# Altium PCB PCB2.PcbDoc
Units mm, origin at the board's own origin, x right, y up, seen from the top; angles counter-clockwise.
Board outline 12.83 x 12.7 mm, 2 copper layers (Top Layer, Bottom Layer); 12 components, 10 nets, 28 pads, 6 vias.
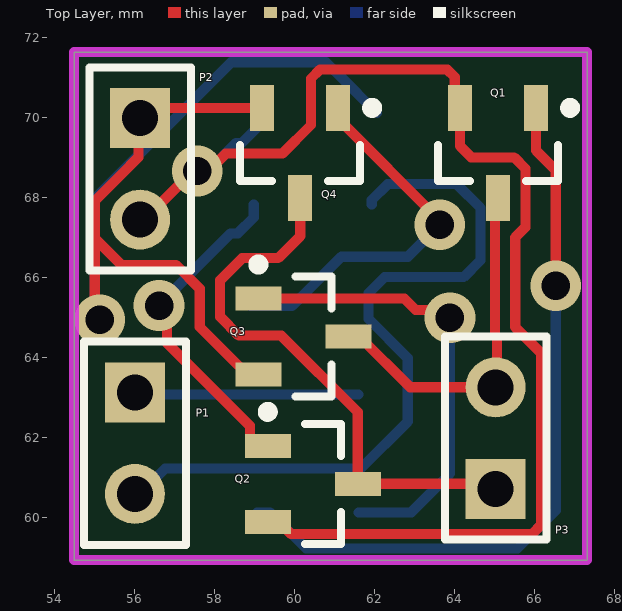
[diagram p0: Top Layer view]
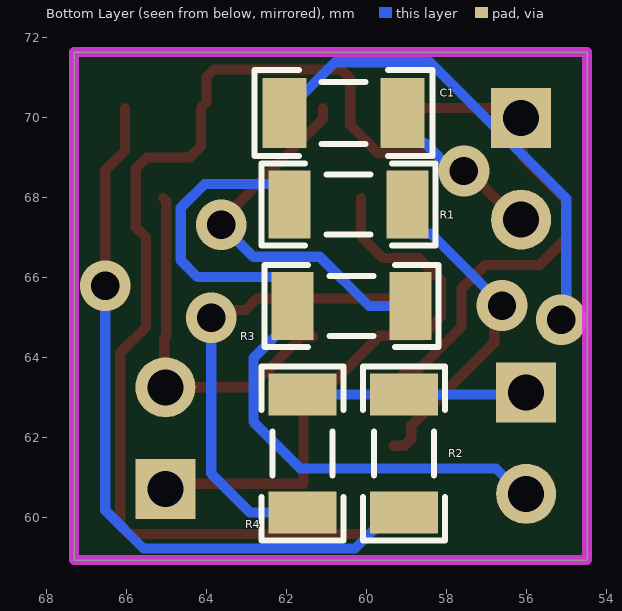
[diagram p1: Bottom Layer view, seen from below]
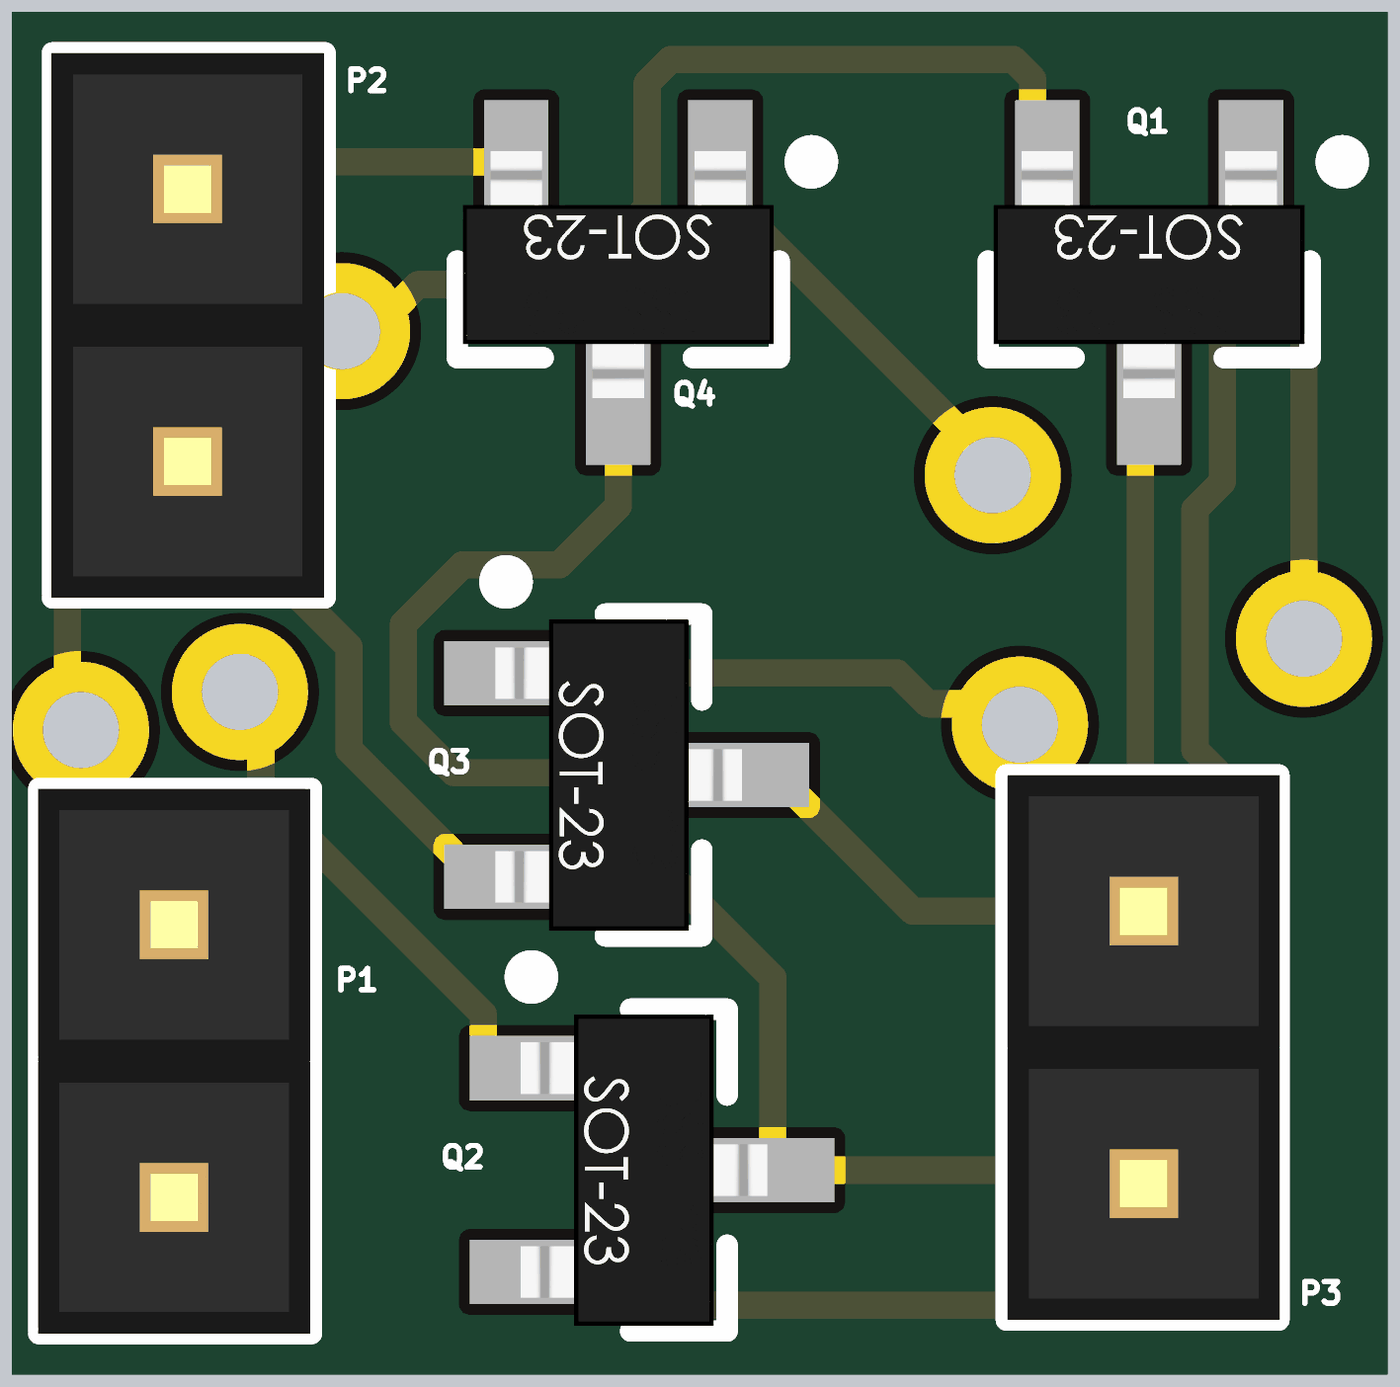
[diagram p2: 3D render of the assembled board from above, using the file's embedded part models]
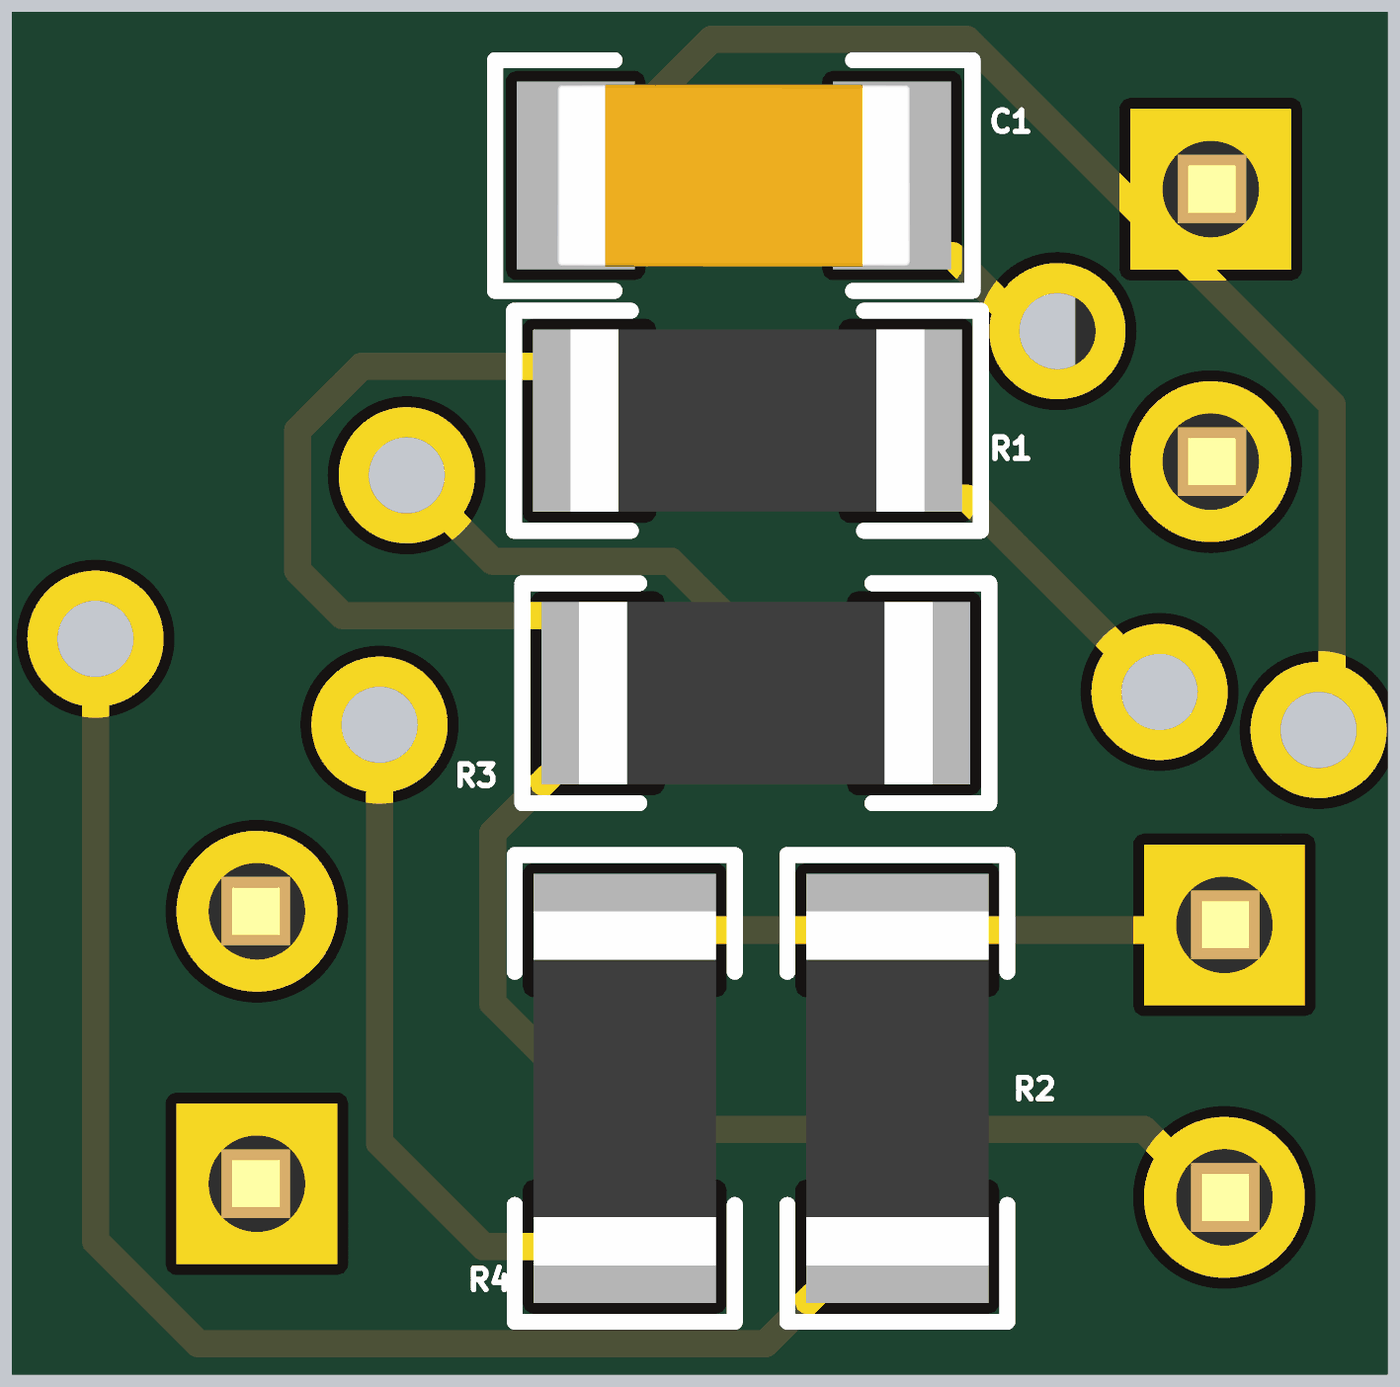
[diagram p3: 3D render of the assembled board from below, using the file's embedded part models]

## Layer stack, top to bottom
Top Solder: solder mask 0.0102, Solder Resist, Dk 3.5
Top Layer: signal copper 0.0356
Dielectric 1: dielectric 0.32, FR-4, Dk 4.8
Bottom Layer: signal copper 0.0356
Bottom Solder: solder mask 0.0102, Solder Resist, Dk 3.5

## Board outline
54.483,58.928 54.483,71.628 67.31,71.628 67.31,58.928

## Design rules (kind name [scope] priority, off if disabled: settings)
Clearance [All] p1: gap=0.254 ignorepadtopadclearanceinfootprint=FALSE except(0: Arc-Hole Track-Hole SMDPad-Hole THPad-Hole Via-Hole Fill-Hole Poly-Hole Region-Hole Text-Hole)
PolygonConnect [All] p1: connectstyle=Relief reliefconductorwidth=0.254 reliefentries=4 polygonreliefangle="90 Angle" airgapwidth=0.254
RoutingVias [All] p1: holewidth=0.711 width=1.27 viastyle="Through Hole" minholewidth=0.711 minwidth=1.27 maxholewidth=0.711 maxwidth=1.27
SolderMaskExpansion [All] p1: expansion=0.102 istentingtop=FALSE
Width [All] p1: maxlimit=0.254 minlimit=0.254 preferedwidth=0.254
30 further rules are at their usual default settings.

## Components (designator, comment, footprint, x,y, rotation, side; value= is the part's Value field where it differs from the comment)
C1 "10uF" CAP1206 60.579,70.104 r180 bottom
P1 "Header 2" HDR1X2 56.007,63.119 r270 top
P2 "Header 2" HDR1X2 56.134,69.977 r270 top
P3 "Header 2" HDR1X2 65.024,60.706 r90 top
Q1 "BC807" SOT23_BEC_N 65.085,69.106 r270 top
Q2 "BC807" SOT23_BEC_N 60.452,60.833 r0 top
Q3 "BC817" SOT23_BEC_N 60.216,64.516 r0 top
Q4 "BC817" SOT23_BEC_N 60.137,69.106 r270 top
R1 "1K" RES1206 60.452,67.818 r180 bottom
R2 "1K" RES1206 59.055,61.595 r90 bottom
R3 "1K" RES1206 60.374,65.278 r180 bottom
R4 "1K" RES1206 61.595,61.595 r90 bottom

## Footprints (in the part's own frame and the unit in brackets; to place one, negate y for a bottom-side part, rotate by r counter-clockwise, add the part's x,y. Pads: shape width x height; smd on the part's side, far side on the other; paste and mask are expansions set on the pad)
CAP1206 [mm] "Chip Capacitor, 2-Leads, Body 3/20x1/60mm, IPC Medium Density DESIGNER:ABBAS BASEREH"
  rect 1.1x1.75 smd: 1(-1.475,0) 2(1.475,0)
  silkscreen extent -2.22,-1.07 2.22,1.07, body extent -1.65,-0.85 1.65,0.85, height 0.94
HDR1X2 [mm] "Connector; Header; 2 Position"
  rect 1.5x1.5 hole 0.9: 1(0,0)
  round 1.5 hole 0.9: 2(2.54,0)
  silkscreen extent -1.27,-1.27 3.81,1.27, body extent -1.27,-1.28 3.81,1.26, height 8.79
RES1206 [mm] "Chip Resistor, 2-Leads, Body 3/20x1/60mm, IPC Medium Density DESIGNER:ABBAS BASEREH"
  rect 1.05x1.7 smd: 1(-1.475,0) 2(1.475,0)
  silkscreen extent -2.17,-1.02 2.17,1.02, body extent -1.65,-0.85 1.65,0.85, height 0.94
SOT23_BEC_N [mm] "SOT23, 3-Leads, Body 2.9x1.3mm, Pitch 0.95mm, Lead Span 2.4mm, IPC Medium Density"
  rect 1.15x0.6 smd: 1(-1.125,0.95) 2(-1.125,-0.95) 3(1.125,0)
  silkscreen extent -1.25,-1.5 0.7,1.93, body extent -1.23,-1.45 1.07,1.45, height 1

## Part data
C1: library part "CAP SMD PACKAGE", "TOTAL CAPACITOR SMD PACK", Data=2017-3-10, Desc.="CAP SMD TOTAL PACKAGES", Designer="Abbas Basereh"
P1 P2 P3: "Header, 2-Pin", LatestRevisionDate=17-Jul-2002, LatestRevisionNote="Re-released for DXP Platform.", Publisher="Altium Limited"
Q1 Q2: library part PNP, "PNP Bipolar Transistor", LatestRevisionDate=29-May-2009, LatestRevisionNote="IPC-7351 Footprint Added.", PackageDescription="3-Pin SOT-23 Package 0.95 mm Pitch, 2.4 mm Lead Span", PackageReference=SOT-23B, PackageVersion=Aug-1999, Published=8-Jun-2000, Publisher="Altium Limited"
Q3 Q4: library part NPN, "NPN Bipolar Transistor", LatestRevisionDate=29-May-2009, LatestRevisionNote="IPC-7351 Footprint Added.", PackageDescription="3-Pin SOT-23 Package 0.95 mm Pitch, 2.4 mm Lead Span", PackageReference=SOT-23B, PackageVersion=Aug-1999, Published=8-Jun-2000, Publisher="Altium Limited"
R1 R2 R3 R4: library part "RES SMD PACKAGE", "TOTAL SMD RESISTOR PACK", Data=2017-3-10, Desc.="RES SMD PAKAGES", Designer="Abbas Basereh"

## Via types
v1: diameter 1.27, hole 0.711, Top Layer to Bottom Layer, 6 vias

## Nets (pads, with @x,y where several pads share a name; then routed paths per layer and width w, separated by ;. In a path a pad name is that pad's centre, name@x,y a point inside that pad or via, vN(x,y) a via of type N, cw(c..) or ccw(c..) an arc to the next point about the centre after c; other vN are vias at no path point)
GND: C1.1 P2.1 Q3.2 Q4.2 | length 26.8
  Top Layer w0.254: v1(55.129,64.935) 55.003,65.061 55.003,66.969 ; Q3.2 58.816,63.566 57.627,64.755 57.627,65.711 57.032,66.306 56.603,66.306 55.666,66.306 55.003,66.969 ; Q4.2 56.388,70.231 56.092,69.935 56.092,68.995 55.666,68.568 55.003,67.905 55.003,66.969
  Bottom Layer w0.254: v1(55.129,64.935) 55.003,65.061 55.003,67.967 56.574,69.537 58.41,71.374 60.784,71.374 61.098,71.06 C1.1
NetLabel1: Q2.1 R1.2 | length 8.4
  Top Layer w0.254: v1(56.611,65.29) 56.805,65.096 56.805,64.359 58.879,62.286 58.879,61.956 59.052,61.783 Q2.1
  Bottom Layer w0.254: v1(56.611,65.29) 56.611,65.307 58.399,67.095 58.579,67.095 58.977,67.493 R1.2
NetP1_1: P1.1 R2.2 R4.2 | length 5.6
  Bottom Layer w0.254: P1.1 56.056,63.07 R2.2 R4.2
NetP1_2: P1.2 R1.1 R3.1 | length 18.9
  Bottom Layer w0.254: P1.2 56.126,60.579 56.761,61.214 61.653,61.214 62.826,62.387 62.826,63.976 61.849,64.953 61.849,65.603 62.247,66.001 64.223,66.001 64.643,66.421 64.643,67.731 64.048,68.326 62.325,68.326 61.927,67.928 R1.1
NetP3_1: P3.1 Q2.3 Q4.3 | length 14.1
  Top Layer w0.254: Q4.3 60.137,67.025 59.586,66.474 58.686,66.474 58.135,65.924 58.135,65.008 58.605,64.539 59.667,64.539 61.577,62.629 Q2.3 64.897,60.833 P3.1
NetP3_2: P3.2 Q1.3 Q3.3 | length 9
  Top Layer w0.254: Q3.3 61.616,64.516 62.886,63.246 P3.2 65.055,63.277 65.055,64.489 65.004,64.54 65.004,67.9 Q1.3
NetQ1_1: Q1.1 R2.1 | length 18.5
  Top Layer w0.254: Q1.1 66.035,69.163 66.528,68.67 v1(66.528,65.786)
  Bottom Layer w0.254: R2.1 59.38,60.12 60.286,59.214 65.571,59.214 66.528,60.171 v1(66.528,65.786)
NetQ3_1: Q3.1 R4.1 | length 11.6
  Top Layer w0.254: Q3.1 62.738,65.466 63.025,65.179 63.687,65.179 v1(63.881,64.985)
  Bottom Layer w0.254: R4.1 62.914,60.12 63.881,61.087 v1(63.881,64.985)
NetQ4_1: Q4.1 R3.2 | length 9.5
  Top Layer w0.254: Q4.1 61.087,69.956 63.627,67.416 v1(63.627,67.31)
  Bottom Layer w0.254: R3.2 59.935,65.278 61.166,66.509 62.826,66.509 v1(63.627,67.31)
VCC: C1.2 P2.2 Q1.2 Q2.2 | length 32.6
  Top Layer w0.254: P2.2 56.24,67.437 57.277,68.474 v1@57.277,68.58 ; v1@57.277,68.653 v1(57.563,68.653) ; v1@57.563,68.58 57.765,68.58 58.273,69.088 59.69,69.088 60.406,69.804 60.406,70.964 60.629,71.187 63.814,71.187 64,71.001 64,70.366 Q1.2 64.135,69.275 64.416,68.994 65.485,68.994 65.766,68.714 65.766,67.248 65.512,66.994 65.512,64.75 66.155,64.107 66.155,59.798 65.932,59.575 59.91,59.575 59.602,59.883 Q2.2
  Bottom Layer w0.254: v1(57.563,68.653) 57.838,68.653 58.541,69.356 58.681,69.356 59.104,69.779 C1.2

## Keep-outs
Keep-Out Layer:
  the board outline again, w0.254